# EAGLE board E-Book v8 (EAGLE 9.7.0), part 1 of 3
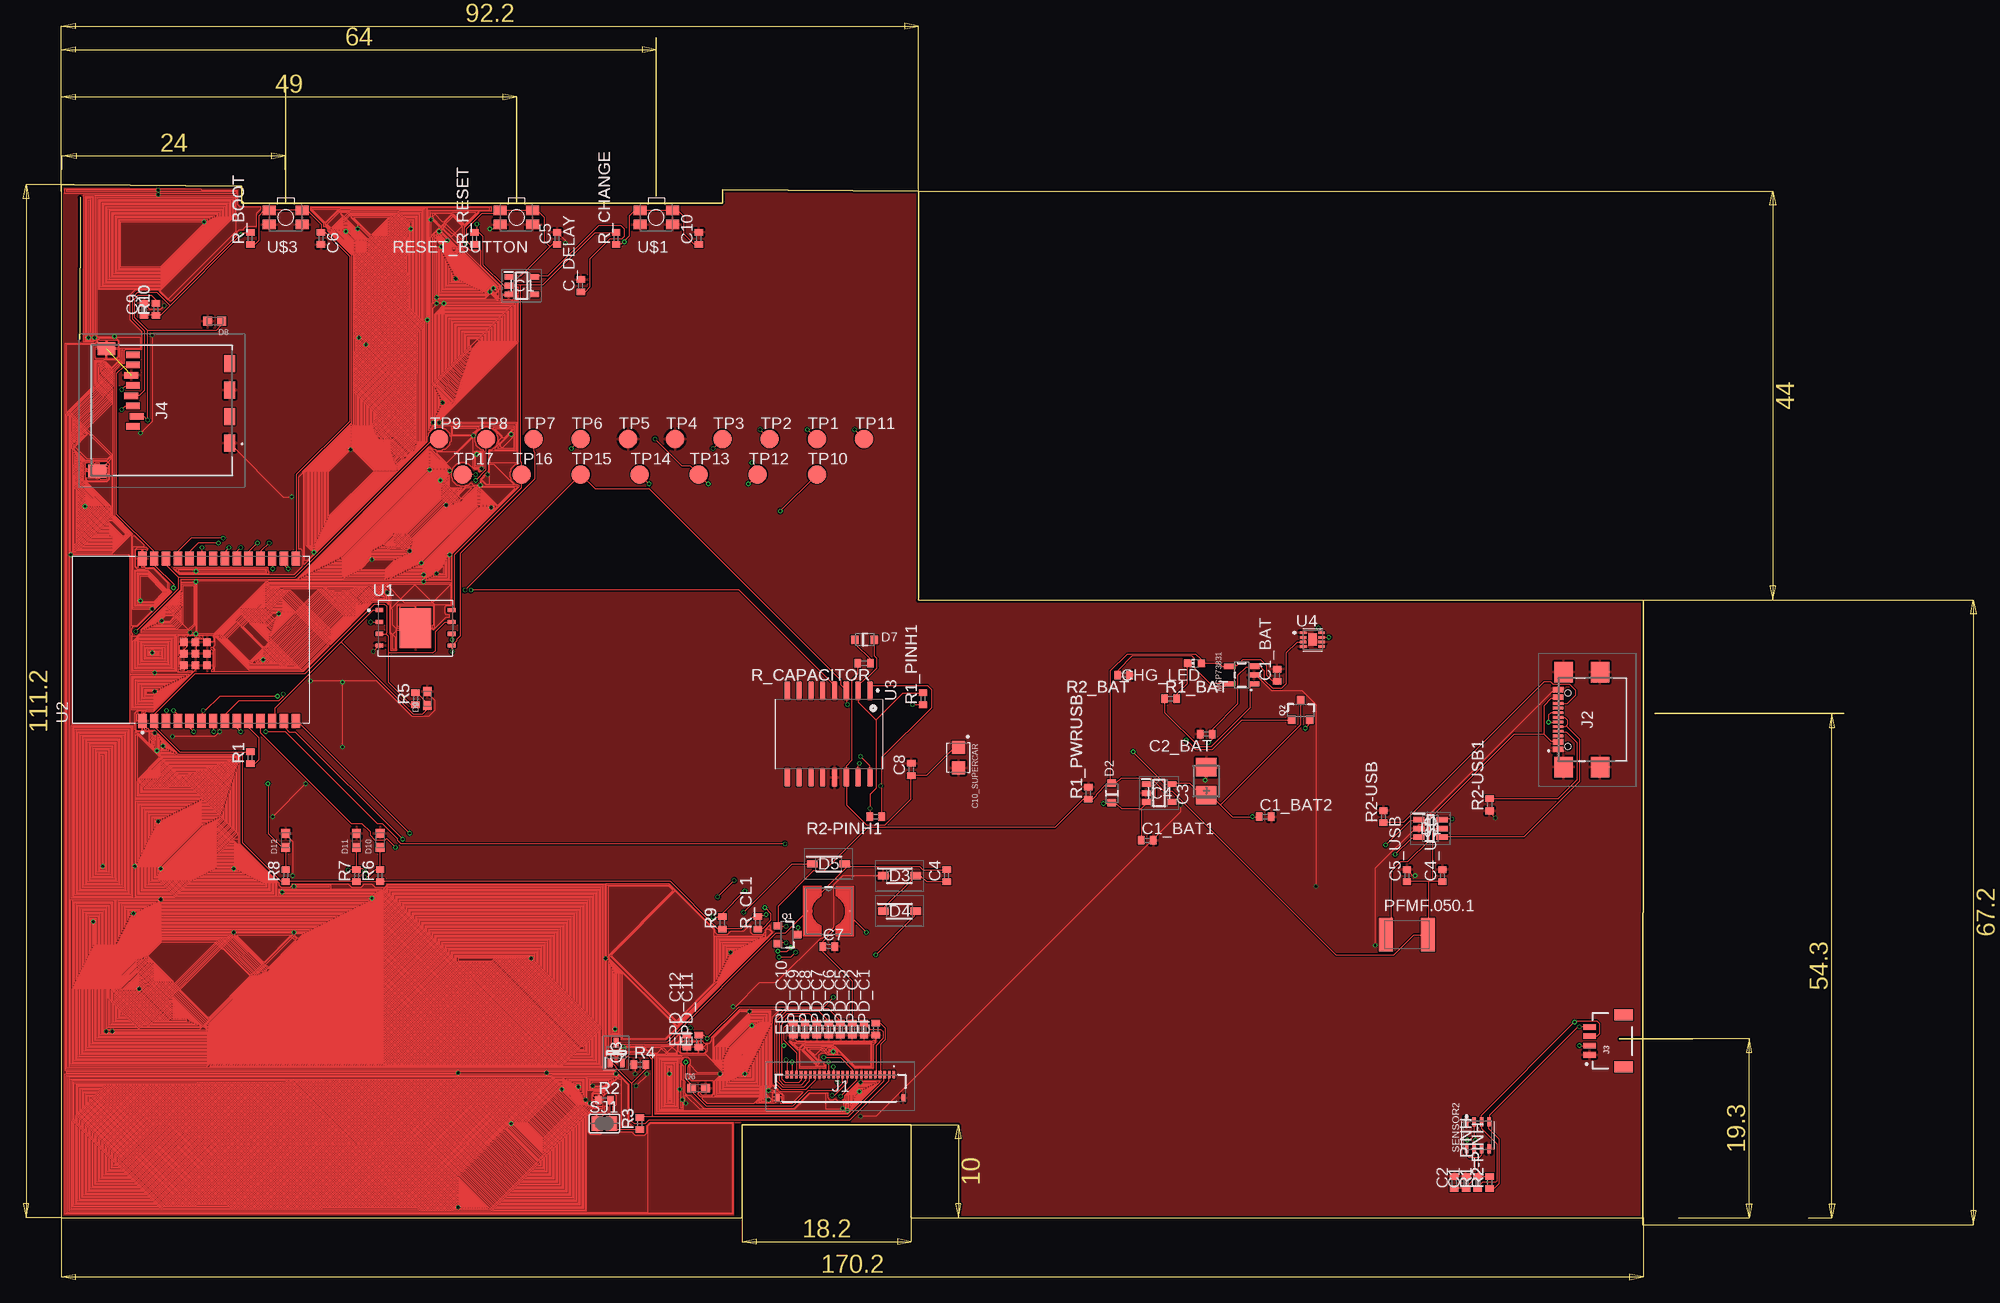
[diagram p0: board, top side]
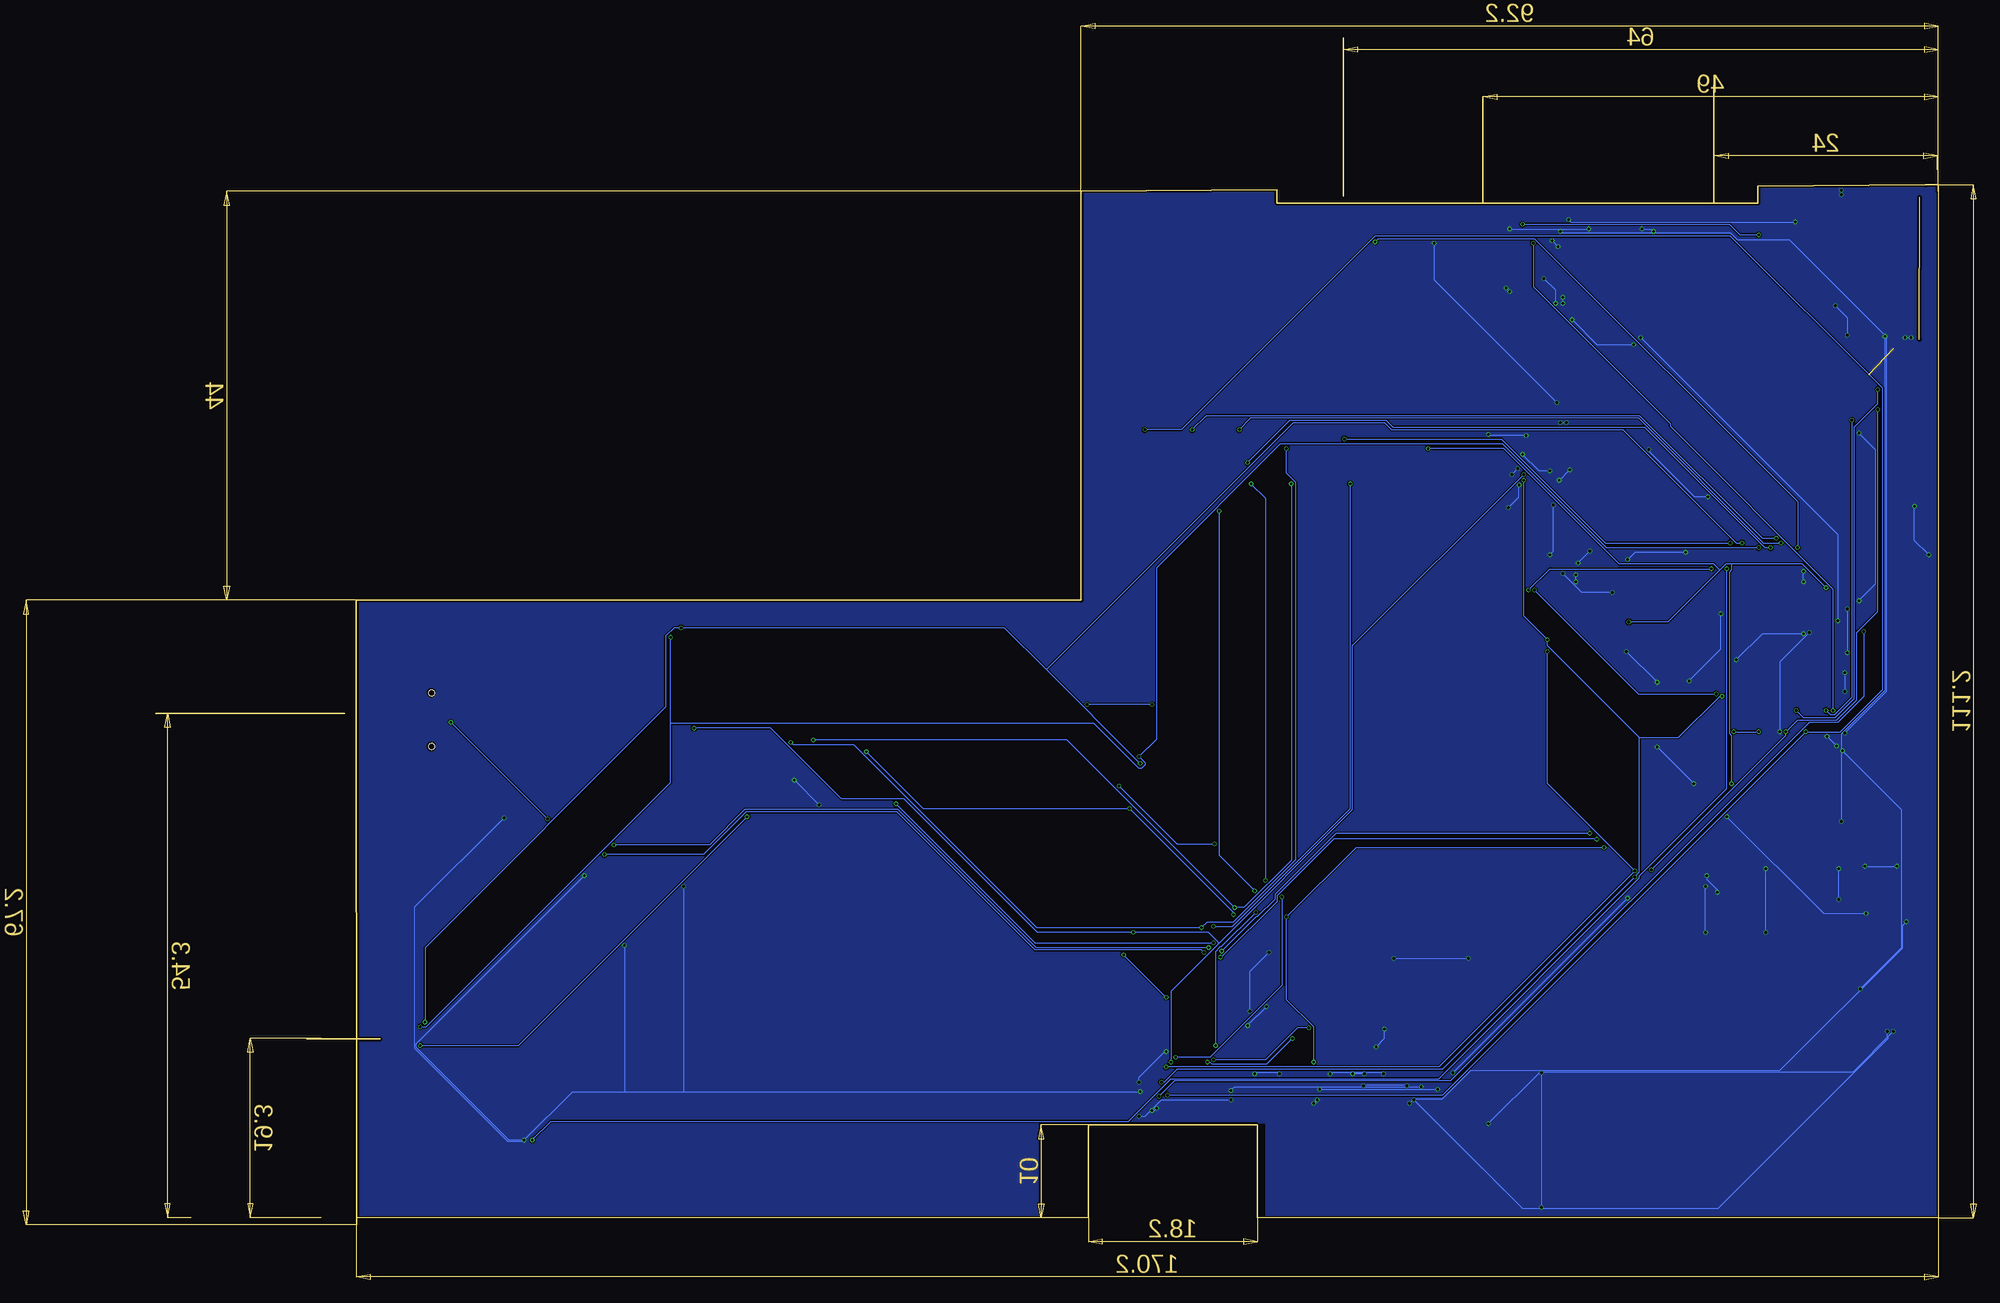
[diagram p1: board, bottom side, seen from below]

Size 191.77 x 127.7 mm. Coordinates in mm from the lower left corner, seen from the top.
Outline: 170.2,0.71 91.44,0.71 91.44,10.71 73.24,10.71 73.24,0.71 0,0.71 0,111.91 1.35,111.9 19.39,111.76 19.39,109.93 71.12,109.93 71.12,111.36 92.2,111.2 92.2,67.2 170.2,67.16 170.18,0
Outline: 191.77,55.01 171.45,55.01
Outline: 175.56,19.98 167.64,19.98
Outline: 24.13,122.63 24.13,109.93
Outline: 48.97,121.38 48.97,109.93
Outline: 64,127.7 64,110.65
Copper layers (1*16): Top 0.035mm / dielectric 1.6mm / Bottom 0.035mm
Design rules "jlcpcb-2layers": minimum track width 5mil, minimum drill 0.3mm, track to track 5mil, track to pad 5mil, pad to pad 5mil, via to via 5mil, smd to smd 5mil, copper to edge 0.2mm, drill to drill 6mil, minimum pad ring 10mil, minimum via ring 3mil, stop-mask expansion 4mil, vias tented up to drill 0mil, thermal gap 10mil

## Footprints (pad centres in the part's own frame; a part is rotated, then mirrored left to right if it is on the bottom)
ESP32_WROVER_EAGLE-LTSPICE_C0402 = smd 0.7 x 0.9: 1 -0.65,0; 2 0.65,0
EAGLE-LTSPICE_C0402 = smd 0.7 x 0.9: 1 -0.65,0; 2 0.65,0
RCL_CT3528 = smd 2 x 2.2: + -1.5,0; - 1.5,0
CAPCP3225X100N = smd 1.4 x 1.4: 1 -1.1,0; 2 1.1,0
ADAFRUIT_CHIP-LED0603 = smd 0.8 x 0.8: A 0,-0.75; C 0,0.75
SOT95P280X145-6N = smd 1.2 x 0.6: 1 -1.25,0.95; 2 -1.25,0; 3 -1.25,-0.95; 4 1.25,-0.95; 5 1.25,0; 6 1.25,0.95
ESP32_WROVER_AVX---SD0805S020S1R0_AVX_SD0805S020S1R0_0 = smd 0.8 x 0.9: 1 -1.05,0; 2 1.05,0
SOD3716X135N = smd 1.15 x 0.8: 1 -1.75,0; 2 1.75,0
DIOC1608X36N = smd 0.97 x 0.94: 1 -0.75,0; 2 0.75,0
SOT95P280X125-5N = smd 0.9 x 0.6: 1 -1.4,0.95; 2 -1.4,0; 3 -1.4,-0.95; 4 1.4,-0.95; 5 1.4,0.95
SOT95P280X120-5N = smd 0.9 x 0.6: 1 -1.4,0.95; 2 -1.4,0; 3 -1.4,-0.95; 4 1.4,-0.95; 5 1.4,0.95
FH34SRJ24S05SH99 = smd 0.3 x 0.8: 1 5.75,1.45; 2 5.25,1.45; 3 4.75,1.45; 4 4.25,1.45; 5 3.75,1.45; 6 3.25,1.45; 7 2.75,1.45; 8 2.25,1.45; 9 1.75,1.45; 10 1.25,1.45; 11 0.75,1.45; 12 0.25,1.45; 13 -0.25,1.45; 14 -0.75,1.45; 15 -1.25,1.45; 16 -1.75,1.45; 17 -2.25,1.45; 18 -2.75,1.45; 19 -3.25,1.45; 20 -3.75,1.45; 21 -4.25,1.45; 22 -4.75,1.45; 23 -5.25,1.45; 24 -5.75,1.45 | smd 0.4 x 0.8: MP1 6.75,-1.05; MP2 -6.75,-1.05
SAMACSYS_PARTS_USB4110GFA = smd 0.3 x 1.15: A1 -3.35,3.678; A4 -2.55,3.678; A5 -1.25,3.678; A6 -0.25,3.678; A7 0.25,3.678; A8 1.25,3.678; A9 2.55,3.678; A12 3.35,3.678; B1 3.05,3.678; B4 2.25,3.678; B5 1.75,3.678; B6 0.75,3.678; B7 -0.75,3.678; B8 -1.75,3.678; B9 -2.25,3.678; B12 -3.05,3.678 | smd 2.18 x 2: MP1 -5.11,-0.827; MP2 5.11,-0.827; MP3 -5.11,3.103; MP4 5.11,3.103 | hole 0.65: -2.89,2.603; 2.89,2.603
JST04_1MM_RA = smd 0.6 x 1.35: 1 -1.5,0; 2 -0.5,0; 3 0.5,0; 4 1.5,0 | smd 1.2 x 2: NC1 2.8,-3.675; NC2 -2.8,-3.675
112ATAARR03ATTEND = smd 1.8 x 1.2: G1 10.6,10.4; G2 4.9,10.4; S1 7.75,10.4; S2 2.05,10.4 | smd 1.4 x 1.9: G3 13.6,-3.85; G4 0.45,-2.85 | smd 0.7 x 1.5: P1 8.8,0; P2 7.7,0.4; P3 6.6,0; P4 5.5,-0.2; P5 4.4,0; P6 3.3,-0.2; P7 2.2,0; P8 1.1,0
IND_4828-WE-TPC_WRE = smd 0.127 x 0.127: 1 -2.286,0; 2 2.286,0
ESP32_WROVER_SPARKFUN-IC-POWER_SOT23-5 = smd 0.55 x 1.2: 1 -0.95,-1.3; 2 0,-1.3; 3 0.95,-1.3; 4 0.95,1.3; 5 -0.95,1.3
ESP32C6_VARISTOR_CT/CN1812 = smd 1.5 x 3.6: 1 -2.25,0; 2 2.25,0
ESP32_WROVER_SPARKFUN-DISCRETESEMI_SOT23-3 = smd 0.8 x 0.9: 1 -0.95,-1; 2 0.95,-1; 3 0,1.1
SOT65P210X110-3N = smd 1.05 x 0.5: 1 -1.05,0.65; 2 -1.05,-0.65; 3 1.05,0
ESP32_WROVER_EAGLE-LTSPICE_R0402 = smd 0.7 x 0.9: 1 -0.65,0; 2 0.65,0
MYBUTTON = smd 1.4 x 1.05: 1 1.75,0.75; 2 -1.75,0.75; 3 -1.75,-0.75; 4 1.75,-0.75
ESP32_WROVER_BME680_PSON80P300X300X100-8N = smd 1.016 x 0.5: 1 1.458,1.2; 2 1.458,0.4; 3 1.458,-0.4; 4 1.458,-1.2; 5 -1.458,-1.22; 6 -1.458,-0.4; 7 -1.458,0.4; 8 -1.458,1.2
SJ = smd 1.168 x 1.6: 1 -0.762,0; 2 0.762,0
TP20R = smd 2 x 2: TP 0,0
SON127P600X800X80-9N = smd 0.94 x 0.44: 1 -3.895,1.905; 2 -3.895,0.635; 3 -3.895,-0.635; 4 -3.895,-1.905; 5 3.895,-1.905; 6 3.895,-0.635; 7 3.895,0.635; 8 3.895,1.905 | smd 3.4 x 4.3: 9 0,0
XCVR_ESP32-C6-WROOM-1-N8 = smd 1.5 x 0.9: 1 -8.75,5.26; 2 -8.75,3.99; 3 -8.75,2.72; 4 -8.75,1.45; 5 -8.75,0.18; 6 -8.75,-1.09; 7 -8.75,-2.36; 8 -8.75,-3.63; 9 -8.75,-4.9; 10 -8.75,-6.17; 11 -8.75,-7.44; 12 -8.75,-8.71; 13 -8.75,-9.98; 14 -8.75,-11.25; 15 8.75,-11.25; 16 8.75,-9.98; 17 8.75,-8.71; 18 8.75,-7.44; 19 8.75,-6.17; 20 8.75,-4.9; 21 8.75,-3.63; 22 8.75,-2.36; 23 8.75,-1.09; 24 8.75,0.18; 25 8.75,1.45; 26 8.75,2.72; 27 8.75,3.99; 28 8.75,5.26 | smd 0.8 x 0.8: 29_1 -2.755,0.79; 29_2 -1.505,0.79; 29_3 -0.255,0.79; 29_4 -2.755,-0.46; 29_5 -1.505,-0.46; 29_6 -0.255,-0.46; 29_7 -2.755,-1.71; 29_8 -1.505,-1.71; 29_9 -0.255,-1.71
SOIC127P1032X265-16N = smd 2.05 x 0.59: 1 -4.655,4.445; 2 -4.655,3.175; 3 -4.655,1.905; 4 -4.655,0.635; 5 -4.655,-0.635; 6 -4.655,-1.905; 7 -4.655,-3.175; 8 -4.655,-4.445; 9 4.655,-4.445; 10 4.655,-3.175; 11 4.655,-1.905; 12 4.655,-0.635; 13 4.655,0.635; 14 4.655,1.905; 15 4.655,3.175; 16 4.655,4.445
SON50P200X200X80-9N = smd 0.76 x 0.27: 1 -0.985,0.75; 2 -0.985,0.25; 3 -0.985,-0.25; 4 -0.985,-0.75; 5 0.985,-0.75; 6 0.985,-0.25; 7 0.985,0.25; 8 0.985,0.75 | smd 0.9 x 1.3: 9 0,0

## Placement (x,y rotation side)
C1  100nF  [ESP32_WROVER_EAGLE-LTSPICE_C0402]  151.13,4.52 90 top
C1_BAT  4.7uF  [ESP32_WROVER_EAGLE-LTSPICE_C0402]  130.81,59.13 90 top
C1_BAT1  4.7uF  [EAGLE-LTSPICE_C0402]  116.84,41.35 0 top
C1_BAT2  4.7uF  [EAGLE-LTSPICE_C0402]  129.54,43.89 0 top
C2  100nF  [ESP32_WROVER_EAGLE-LTSPICE_C0402]  149.86,4.52 90 top
C2_BAT  4.7uF  [ESP32_WROVER_EAGLE-LTSPICE_C0402]  123.19,52.78 180 top
C3  100uF TANT  [RCL_CT3528]  123.19,47.7 90 top
C4  4.7uF/25V  [ESP32_WROVER_EAGLE-LTSPICE_C0402]  95.25,37.54 90 top
C4_USB  1000nF  [EAGLE-LTSPICE_C0402]  148.59,37.54 90 top
C5  1uF  [ESP32_WROVER_EAGLE-LTSPICE_C0402]  53.34,106.12 90 top
C5_USB  4.7uF  [EAGLE-LTSPICE_C0402]  144.78,37.54 90 top
C6  100nF  [ESP32_WROVER_EAGLE-LTSPICE_C0402]  27.94,106.12 270 top
C7  10uF  [ESP32_WROVER_EAGLE-LTSPICE_C0402]  82.55,29.92 0 top
C8  100nF  [ESP32_WROVER_EAGLE-LTSPICE_C0402]  91.44,48.97 90 top
C9  100nF  [ESP32_WROVER_EAGLE-LTSPICE_C0402]  8.89,98.5 90 top
C10  100nF  [ESP32_WROVER_EAGLE-LTSPICE_C0402]  68.58,106.12 90 top
C10_SUPERCAR  CPH3225A  [CAPCP3225X100N]  96.52,50.24 270 top
C_DELAY  100nF  [ESP32_WROVER_EAGLE-LTSPICE_C0402]  55.88,101.04 90 top
CHG_LED  [ADAFRUIT_CHIP-LED0603]  121.92,60.4 90 top
D1  USBLC6-2SC6Y  [SOT95P280X145-6N]  147.32,42.62 0 top
D2  ESP32_WROVER_AVX---SD0805S020S1R0_AVX_SD0805S020S1R0_0_0AVX_SD0805S020S1R0_0_0  [ESP32_WROVER_AVX---SD0805S020S1R0_AVX_SD0805S020S1R0_0]  113.03,46.43 90 top
D3  MBR0530  [SOD3716X135N]  90.17,37.54 0 top
D4  MBR0530  [SOD3716X135N]  90.17,33.73 0 top
D5  MBR0530  [SOD3716X135N]  82.55,38.81 0 top
D6  PGB1010603MR  [DIOC1608X36N]  68.58,14.68 0 top
D7  ESP32_WROVER_AVX---SD0805S020S1R0_AVX_SD0805S020S1R0_0_0AVX_SD0805S020S1R0_0_0  [ESP32_WROVER_AVX---SD0805S020S1R0_AVX_SD0805S020S1R0_0]  86.42,62.94 0 top
D8  PGB1010603MR  [DIOC1608X36N]  16.51,97.23 180 top
D9  PGB1010603MR  [DIOC1608X36N]  39.37,56.59 90 top
D10  PGB1010603MR  [DIOC1608X36N]  34.29,41.35 90 top
D11  PGB1010603MR  [DIOC1608X36N]  31.75,41.35 90 top
D12  PGB1010603MR  [DIOC1608X36N]  24.13,41.35 90 top
EPD_C1  1uF/50V  [ESP32_WROVER_EAGLE-LTSPICE_C0402]  87.63,21.03 90 top
EPD_C2  1uF/50V  [ESP32_WROVER_EAGLE-LTSPICE_C0402]  86.36,21.03 90 top
EPD_C5  0.1uF/50V  [ESP32_WROVER_EAGLE-LTSPICE_C0402]  85.09,21.03 90 top
EPD_C6  1uF/50V  [ESP32_WROVER_EAGLE-LTSPICE_C0402]  83.82,21.03 90 top
EPD_C7  1uF/50V  [ESP32_WROVER_EAGLE-LTSPICE_C0402]  82.55,21.03 90 top
EPD_C8  1uF/50V  [ESP32_WROVER_EAGLE-LTSPICE_C0402]  81.28,21.03 90 top
EPD_C9  1uF/50V  [ESP32_WROVER_EAGLE-LTSPICE_C0402]  80.01,21.03 90 top
EPD_C10  1uF/50V  [ESP32_WROVER_EAGLE-LTSPICE_C0402]  78.74,21.03 90 top
EPD_C11  1uF/50V  [ESP32_WROVER_EAGLE-LTSPICE_C0402]  68.58,19.76 90 top
EPD_C12  1uF/50V  [ESP32_WROVER_EAGLE-LTSPICE_C0402]  67.31,19.76 90 top
IC1  BD5229G-TR  [SOT95P280X125-5N]  49.53,101.04 0 top
IC4  XC6220A331MR-G  [SOT95P280X120-5N]  118.11,46.43 0 top
J1  FH34SRJ-24S-0.5SH_99_  [FH34SRJ24S05SH99]  83.82,14.68 0 top
J2  SAMACSYS_PARTS_USB4110-GF-A  [SAMACSYS_PARTS_USB4110GFA]  164.72,54.33 90 top
J3  QWIIC_RIGHT_ANGLE  [JST04_1MM_RA]  164.42,19.76 90 top
J4  112A-TAAR-R03_ATTEND  [112ATAARR03ATTEND]  7.7,94.69 270 top
L1  744043680IND_4828-WE-TPC_WRE  [IND_4828-WE-TPC_WRE]  82.55,33.73 0 top
MCP73831  ESP32_WROVER_SPARKFUN-IC-POWER_MCP73831  [ESP32_WROVER_SPARKFUN-IC-POWER_SOT23-5]  127,59.13 90 top
PFMF.050.1  ESP32C6_VARISTORCN1812  [ESP32C6_VARISTOR_CT/CN1812]  144.78,31.19 0 top
Q1  20V/4.2A/52mΩ/1.4W  [ESP32_WROVER_SPARKFUN-DISCRETESEMI_SOT23-3]  78.08,31.19 270 top
Q2  20V/4.2A/52mΩ/1.4W  [ESP32_WROVER_SPARKFUN-DISCRETESEMI_SOT23-3]  133.35,55.32 0 top
Q3  SI1308EDL-T1-GE3  [SOT65P210X110-3N]  59.69,18.49 90 top
R1  10K  [ESP32_WROVER_EAGLE-LTSPICE_R0402]  20.32,50.24 90 top
R1_BAT  200  [ESP32_WROVER_EAGLE-LTSPICE_R0402]  119.38,56.59 0 top
R1_PINH  10K  [ESP32_WROVER_EAGLE-LTSPICE_R0402]  152.4,4.52 90 top
R1_PINH1  10K  [ESP32_WROVER_EAGLE-LTSPICE_R0402]  92.71,56.59 90 top
R1_PWRUSB  100K  [ESP32_WROVER_EAGLE-LTSPICE_R0402]  110.49,46.43 90 top
R2  2.2  [ESP32_WROVER_EAGLE-LTSPICE_R0402]  58.42,13.41 0 top
R2-PINH  10K  [ESP32_WROVER_EAGLE-LTSPICE_R0402]  153.67,4.52 90 top
R2-PINH1  10k  [ESP32_WROVER_EAGLE-LTSPICE_R0402]  87.63,43.89 180 top
R2-USB  5K1  [ESP32_WROVER_EAGLE-LTSPICE_R0402]  142.24,43.89 90 top
R2-USB1  5k1  [ESP32_WROVER_EAGLE-LTSPICE_R0402]  153.67,45.16 90 top
R2_BAT  2K  [ESP32_WROVER_EAGLE-LTSPICE_R0402]  114.3,59.13 180 top
R3  0.47  [ESP32_WROVER_EAGLE-LTSPICE_R0402]  62.23,10.87 90 top
R4  10K  [ESP32_WROVER_EAGLE-LTSPICE_R0402]  62.23,17.22 0 top
R5  10K  [ESP32_WROVER_EAGLE-LTSPICE_R0402]  38.1,56.59 90 top
R6  10K  [ESP32_WROVER_EAGLE-LTSPICE_R0402]  34.29,37.54 90 top
R7  10K  [ESP32_WROVER_EAGLE-LTSPICE_R0402]  31.75,37.54 90 top
R8  10K  [ESP32_WROVER_EAGLE-LTSPICE_R0402]  24.13,37.54 90 top
R9  10K  [ESP32_WROVER_EAGLE-LTSPICE_R0402]  71.12,32.46 90 top
R10  10K  [ESP32_WROVER_EAGLE-LTSPICE_R0402]  10.16,98.5 90 top
R_BOOT  10K  [ESP32_WROVER_EAGLE-LTSPICE_R0402]  20.32,106.12 90 top
R_CAPACITOR  15  [ESP32_WROVER_EAGLE-LTSPICE_R0402]  86.36,60.4 180 top
R_CHANGE  10K  [ESP32_WROVER_EAGLE-LTSPICE_R0402]  59.69,106.12 90 top
R_CL1  10K  [ESP32_WROVER_EAGLE-LTSPICE_R0402]  74.93,32.46 90 top
R_RESET  10K  [ESP32_WROVER_EAGLE-LTSPICE_R0402]  44.45,106.12 90 top
RESET_BUTTON  BUTTON_CUSYOMV1  [MYBUTTON]  48.97,108.38 180 top
SENSOR2  ESP32_WROVER_BME680_BME680  [ESP32_WROVER_BME680_PSON80P300X300X100-8N]  152.4,9.6 90 top
SJ1  [SJ]  58.42,10.87 0 top
TP1  TPTP20R  [TP20R]  81.28,84.53 0 top
TP2  TPTP20R  [TP20R]  76.2,84.53 0 top
TP3  TPTP20R  [TP20R]  71.12,84.53 0 top
TP4  TPTP20R  [TP20R]  66.04,84.53 0 top
TP5  TPTP20R  [TP20R]  60.96,84.53 0 top
TP6  TPTP20R  [TP20R]  55.88,84.53 0 top
TP7  TPTP20R  [TP20R]  50.8,84.53 0 top
TP8  TPTP20R  [TP20R]  45.72,84.53 0 top
TP9  TPTP20R  [TP20R]  40.64,84.53 0 top
TP10  TPTP20R  [TP20R]  81.28,80.72 0 top
TP11  TPTP20R  [TP20R]  86.36,84.53 0 top
TP12  TPTP20R  [TP20R]  74.93,80.72 0 top
TP13  TPTP20R  [TP20R]  68.58,80.72 0 top
TP14  TPTP20R  [TP20R]  62.23,80.72 0 top
TP15  TPTP20R  [TP20R]  55.88,80.72 0 top
TP16  TPTP20R  [TP20R]  49.53,80.72 0 top
TP17  TPTP20R  [TP20R]  43.18,80.72 0 top
U1  W25Q512JVEIQ  [SON127P600X800X80-9N]  38.1,64.21 0 top
U2  ESP32-C6-WROOM-1-N8  [XCVR_ESP32-C6-WROOM-1-N8]  13.97,62.94 90 top
U3  DS3231SN#  [SOIC127P1032X265-16N]  82.55,52.78 270 top
U4  MAX17048G+T10  [SON50P200X200X80-9N]  134.62,62.94 0 top
U$1  BUTTON_CUSYOMV1  [MYBUTTON]  64,108.38 180 top
U$3  BUTTON_CUSYOMV1  [MYBUTTON]  24.13,108.38 180 top

## Library data of the parts
C1 C1_BAT C1_BAT1 C1_BAT2 C2 C2_BAT C4 C4_USB C5 C5_USB C6-C10 C_DELAY EPD_C1 EPD_C2 EPD_C5-EPD_C12 = DeskAssistant v19 v1; SPICEMODEL: NONE; SPICEPREFIX: C
C3 = DeskAssistant v19 v1; SPICEPREFIX: C
C10_SUPERCAR = DeskAssistant v19 v1; AVAILABILITY: Not in stock; CHECK_PRICES: https://www.snapeda.com/parts/CPH3225A/Seiko+Instruments/view-part/?ref=eda; DESCRIPTION: 11 mF (EDLC) Supercapacitor 3.3 V 1210 (3225 Metric) - -; MF: Seiko Instruments; MP: CPH3225A; PACKAGE: 1210 Seiko; PRICE: None; PURCHASE-URL: https://www.snapeda.com/api/url_track_click_mouser/?unipart_id=562593&manufacturer=Seiko Instruments&part_name=CPH3225A&search_term=None; SNAPEDA_LINK: https://www.snapeda.com/parts/CPH3225A/Seiko+Instruments/view-part/?ref=snap
CHG_LED PFMF.050.1 RESET_BUTTON SJ1 TP1-TP17 U$1 U$3 = DeskAssistant v19 v1
D1 = DeskAssistant v19 v1; AVAILABILITY: In Stock; CHECK_PRICES: https://www.snapeda.com/parts/USBLC6-2SC6Y/STMicroelectronics/view-part/?ref=eda; DESCRIPTION: 17V Clamp 5A (8/20µs) Ipp Tvs Diode Surface Mount SOT-23-6; MF: STMicroelectronics; MP: USBLC6-2SC6Y; PACKAGE: SOT-23-6 STMicroelectronics; PRICE: None; SNAPEDA_LINK: https://www.snapeda.com/parts/USBLC6-2SC6Y/STMicroelectronics/view-part/?ref=snap
D2 D7 = DeskAssistant v19 v1; CENTROID_NOT_SPECIFIED: No; DATASHEET: http://datasheets.avx.com/schottky.pdf; DIGIKEY_DESCRIPTION: DIODE SCHOTTKY 20V 1A 0805; DIGIKEY_PART_NUMBER: 478-7800-1-ND; LEAD_FREE: yes; MF: AVX; MOUSER_PART_NUMBER: 581-SD0805S020S1R0; PACKAGE: 0805 (2012 metric); PREFIX: D; ROHS: yes; TEMPERATURE_RANGE_HIGH: +125°C; TEMPERATURE_RANGE_LOW: -55°C
D3-D5 = DeskAssistant v19 v1; AVAILABILITY: In Stock; CHECK_PRICES: https://www.snapeda.com/parts/MBR0530/Onsemi/view-part/?ref=eda; DESCRIPTION: Diode Schottky 30 V 500mA Surface Mount SOD-123; MF: ON Semiconductor; MP: MBR0530; PACKAGE: SOD-123-2 ON Semiconductor; PRICE: None; PURCHASE-URL: https://www.snapeda.com/api/url_track_click_mouser/?unipart_id=179458&manufacturer=ON Semiconductor&part_name=MBR0530&search_term=None; SNAPEDA_LINK: https://www.snapeda.com/parts/MBR0530/Onsemi/view-part/?ref=snap
D6 D8-D12 = DeskAssistant v19 v1; AVAILABILITY: In Stock; CHECK_PRICES: https://www.snapeda.com/parts/PGB1010603MR/Littelfuse/view-part/?ref=eda; DESCRIPTION: 150V (Typ) Clamp - Ipp Tvs Diode Surface Mount 0603 (1608 Metric); MF: Littelfuse Inc.; MP: PGB1010603MR; PACKAGE: 0603 Littelfuse Inc.; PRICE: None; PURCHASE-URL: https://www.snapeda.com/api/url_track_click_mouser/?unipart_id=5659453&manufacturer=Littelfuse Inc.&part_name=PGB1010603MR&search_term=None; SNAPEDA_LINK: https://www.snapeda.com/parts/PGB1010603MR/Littelfuse/view-part/?ref=snap
IC1 = DeskAssistant v19 v1; DESCRIPTION: Voltage Detector with Adjustable Delay Time: CMOS processes are utilized to develop high precision, low current consumption CMOS reset ICs that allow arbitrary setting of the delay time. The extensive lineup includes both Nch Open Drain and CMOS output types in a wide range of detection voltages (from 2.3V to 6.0V, in 0.1V steps), enabling selection of the ideal solution based on customer requirements. In addition, the entire series is of course both lead-free and RoHS-compliant.; HEIGHT: 1.25mm; MANUFACTURER_NAME: ROHM Semiconductor; MANUFACTURER_PART_NUMBER: BD5229G-TR; MOUSER_PART_NUMBER: 755-BD5229G-TR; MOUSER_PRICE-STOCK: https://www.mouser.co.uk/ProductDetail/ROHM-Semiconductor/BD5229G-TR?qs=4kLU8WoGk0vvnhrrYwdszw%3D%3D
IC4 = DeskAssistant v19 v1; DESCRIPTION: LDO Voltage Regulators; HEIGHT: 1.2mm; MANUFACTURER_NAME: Torex; MANUFACTURER_PART_NUMBER: XC6220A331MR-G; MOUSER_PART_NUMBER: 865-XC6220A331MR-G; MOUSER_PRICE-STOCK: https://www.mouser.co.uk/ProductDetail/Torex-Semiconductor/XC6220A331MR-G?qs=AsjdqWjXhJ8ZSWznL1J0gg%3D%3D
J1 = DeskAssistant v19 v1; DESCRIPTION: 24 Position FFC, FPC Connector Contacts, Top and Bottom 0.020" (0.50mm) Surface Mount, Right Angle; HEIGHT: 1.1mm; MANUFACTURER_NAME: Hirose; MANUFACTURER_PART_NUMBER: FH34SRJ-24S-0.5SH(99); MOUSER_PART_NUMBER: 798-FH34SRJ24S05SH99; MOUSER_PRICE-STOCK: https://www.mouser.co.uk/ProductDetail/Hirose-Connector/FH34SRJ-24S-0.5SH99?qs=vcbW%252B4%252BSTIpKBl5ap9J8Fw%3D%3D
J2 = DeskAssistant v19 v1; DESCRIPTION: CONN USB 2.0 TYPE-C R/A SMT; HEIGHT: 3.26mm; MANUFACTURER_NAME: GCT (GLOBAL CONNECTOR TECHNOLOGY); MANUFACTURER_PART_NUMBER: USB4110-GF-A; MOUSER_PART_NUMBER: 640-USB4110-GF-A; MOUSER_PRICE-STOCK: https://www.mouser.co.uk/ProductDetail/GCT/USB4110-GF-A?qs=KUoIvG%2F9IlYiZvIXQjyJeA%3D%3D
J3 = DeskAssistant v19 v1; PROD_ID: CONN-13694
J4 = DeskAssistant v19 v1; DESCRIPTION: Micro SD Card Socket, Push-Push Type, Top Mount, SMT, H=1.83mm, 10u; HEIGHT: 1.9mm; MANUFACTURER_NAME: ATTEND; MANUFACTURER_PART_NUMBER: 112A-TAAR-R03 ATTEND
L1 = DeskAssistant v19 v1; COPYRIGHT: Copyright (C) 2024 Ultra Librarian. All rights reserved.; MANUFACTURER_PART_NUMBER: 744043680; MFR_NAME: Wurth Electronics
MCP73831 = DeskAssistant v19 v1; PROD_ID: IC-09995
Q1 Q2 = DeskAssistant v19 v1; PROD_ID: TRAN-14388
Q3 = DeskAssistant v19 v1; AVAILABILITY: In Stock; CHECK_PRICES: https://www.snapeda.com/parts/SI1308EDL-T1-GE3/Vishay+Siliconix/view-part/?ref=eda; DESCRIPTION: Si1308EDL-T1-GE3 N-channel MOSFET Transistor, 1.5 A, 30 V, 3-Pin SC-70 | Siliconix / Vishay SI1308EDL-T1-GE3; MF: Vishay Siliconix; MP: SI1308EDL-T1-GE3; PACKAGE: SOT-323 Vishay Semiconductor; PRICE: None; PURCHASE-URL: https://www.snapeda.com/api/url_track_click_mouser/?unipart_id=274603&manufacturer=Vishay Siliconix&part_name=SI1308EDL-T1-GE3&search_term=None; SNAPEDA_LINK: https://www.snapeda.com/parts/SI1308EDL-T1-GE3/Vishay+Siliconix/view-part/?ref=snap
R1 R1_BAT R1_PINH R1_PINH1 R1_PWRUSB R2 R2-PINH R2-PINH1 R2-USB R2-USB1 R2_BAT R3-R10 R_BOOT R_CAPACITOR R_CHANGE R_CL1 R_RESET = DeskAssistant v19 v1; SPICEMODEL: NONE; SPICEPREFIX: R
SENSOR2 = DeskAssistant v19 v1; AVAILABILITY: Unavailable; DESCRIPTION: Integrated Environmental Unit; MF: Bosch Sensortec; MP: BME680; PACKAGE: LGA-8 Bosch Tools; PRICE: None
U1 = DeskAssistant v19 v1; AVAILABILITY: In Stock; CHECK_PRICES: https://www.snapeda.com/parts/W25Q512JVEIQ/Winbond+Electronics/view-part/?ref=eda; DESCRIPTION: FLASH - NOR Memory IC 512Mb (64M x 8) SPI - Quad I/O 133 MHz 8-WSON (8x6); MF: Winbond Electronics; MP: W25Q512JVEIQ; PACKAGE: Package; PRICE: None; SNAPEDA_LINK: https://www.snapeda.com/parts/W25Q512JVEIQ/Winbond+Electronics/view-part/?ref=snap
U2 = DeskAssistant v19 v1; AVAILABILITY: In Stock; CHECK_PRICES: https://www.snapeda.com/parts/ESP32-C6-WROOM-1-N8/Espressif+Systems/view-part/?ref=eda; DESCRIPTION: Multiprotocol Modules ESP32-C6 module, Wi-Fi 6 in 2.4 GHz band, Bluetooth 5, Zigbee 3.0 and Thread. ESP34-WROOM Compatible - ENGINEERING SAMPLE; MF: Espressif Systems; MP: ESP32-C6-WROOM-1-N8; PACKAGE: None; PRICE: None; SNAPEDA_LINK: https://www.snapeda.com/parts/ESP32-C6-WROOM-1-N8/Espressif+Systems/view-part/?ref=snap
U3 = DeskAssistant v19 v1; AVAILABILITY: In Stock; CHECK_PRICES: https://www.snapeda.com/parts/DS3231SN%23/Analog+Devices/view-part/?ref=eda; DESCRIPTION: Extremely Accurate I²C-Integrated RTC/TCXO/Crystal; MF: Analog Devices; MP: DS3231SN#; PACKAGE: SOIC-16 Maxim; PRICE: None; PURCHASE-URL: https://www.snapeda.com/api/url_track_click_mouser/?unipart_id=99048&manufacturer=Analog Devices&part_name=DS3231SN#&search_term=None; SNAPEDA_LINK: https://www.snapeda.com/parts/DS3231SN%23/Analog+Devices/view-part/?ref=snap
U4 = DeskAssistant v19 v1; AVAILABILITY: In Stock; CHECK_PRICES: https://www.snapeda.com/parts/MAX17048G+T10/Analog+Devices/view-part/?ref=eda; DESCRIPTION: 3µA 1-Cell/2-Cell Fuel Gauge with ModelGauge; MF: Analog Devices; MP: MAX17048G+T10; PACKAGE: TDFN-8 Maxim; PRICE: None; PURCHASE-URL: https://www.snapeda.com/api/url_track_click_mouser/?unipart_id=329239&manufacturer=Analog Devices&part_name=MAX17048G+T10&search_term=None; SNAPEDA_LINK: https://www.snapeda.com/parts/MAX17048G+T10/Analog+Devices/view-part/?ref=snap

## Nets
3V3: C1_BAT2.1 C3.+ C9.1 D7.2 IC1.2 IC4.5 J3.2 J4.P4 Q2.3 R1.2 R1_PINH1.2 R2-PINH1.2 R5.1 R6.1 R7.1 R8.1 R9.1 R10.1 R_BOOT.2 R_CHANGE.2 R_CL1.2 R_RESET.2 TP16.TP U1.3 U1.7 U1.8 U2.2 U3.2
32KHZ: R2-PINH1.1 U2.9 U3.1
DN: D1.4 J2.A7 J2.B7
DP: D1.6 J2.A6 J2.B6
EPD_3V3: C7.1 EPD_C5.2 J1.15 J1.16 L1.2 Q2.2 TP17.TP
EPD_3V3_C: Q2.1 R_CL1.1 TP13.TP U2.18
EPD_BUSY: J1.9 TP9.TP U2.26
EPD_CS: D6.1 J1.12 R9.2 TP10.TP U2.11
EPD_DC: J1.11 TP11.TP U2.5
EPD_RST: J1.10 TP12.TP U2.21
FLASH_CS: D9.1 R5.2 U1.1 U2.12
GDR: J1.2 Q3.1 R4.2
GND: C1.2 C1_BAT1.2 C1_BAT2.2 C1_BAT.2 C2.2 C2_BAT.2 C3.- C4_USB.2 C5.2 C5_USB.2 C6.2 C7.2 C8.2 C9.2 C10.2 C10_SUPERCAR.2 C_DELAY.2 D1.2 D3.1 D6.2 D8.2 D9.2 D10.2 D11.2 D12.2 EPD_C1.1 EPD_C2.1 EPD_C5.1 EPD_C6.1 EPD_C7.1 EPD_C8.1 EPD_C9.1 EPD_C10.1 EPD_C11.1 EPD_C12.1 IC1.3 IC4.2 J1.8 J1.17 J1.MP1 J1.MP2 J2.A1 J2.A12 J2.B1 J2.B12 J2.MP1 J2.MP2 J2.MP3 J2.MP4 J3.1 J4.G1 J4.G2 J4.G3 J4.G4 J4.P6 MCP73831.2 R1_PWRUSB.2 R2-USB1.1 R2-USB.2 R2.1 R2_BAT.1 R4.1 RESET_BUTTON.1 RESET_BUTTON.2 SENSOR2.1 SENSOR2.5 SENSOR2.7 SJ1.1 TP4.TP TP5.TP U1.4 U1.9 U2.1 U2.28 U2.29_1 U2.29_2 U2.29_3 U2.29_4 U2.29_5 U2.29_6 U2.29_7 U2.29_8 U2.29_9 U3.13 U4.1 U4.4 U4.6 U4.9 U$1.1 U$1.2 U$3.1 U$3.2
GPIO8: R1.1 U2.10
I2C_PW: C1.1 C2.1 R1_PINH.2 R2-PINH.2 SENSOR2.2 SENSOR2.6 SENSOR2.8 U2.17
INT_RTC: R1_PINH1.1 TP15.TP U2.8 U3.3
IO/BOOT: C6.1 R_BOOT.1 U2.15 U$3.3 U$3.4
IO/CHANGE: C10.1 R_CHANGE.1 U2.23 U$1.3 U$1.4
MISO: D12.1 J4.P7 R8.2 TP6.TP U1.2 U2.27
MOSI: D11.1 J1.14 J4.P3 R7.2 TP7.TP U1.5 U2.7
N$1: J2.B5 R2-USB.1
N$2: J2.A5 R2-USB1.2
N$4: CHG_LED.C R1_BAT.2
N$5: EPD_C1.2 J1.4
N$6: MCP73831.5 R2_BAT.2
N$7: EPD_C2.2 J1.5
N$9: MCP73831.1 R1_BAT.1
N$11: EPD_C6.2 J1.18
N$12: EPD_C7.2 J1.19
N$13: EPD_C8.2 J1.20
N$15: EPD_C10.2 J1.22
N$17: EPD_C12.2 J1.24
N$24: C_DELAY.1 IC1.5
N$26: C1_BAT1.1 D2.1 IC4.1 IC4.3 Q1.2
N$30: C4.1 D3.2 D4.1
N$31: D7.1 R_CAPACITOR.1
PREVGH: D5.1 EPD_C9.2 J1.21
PREVGL: D4.2 EPD_C11.2 J1.23
RESE: J1.3 Q3.2 R3.2
RESE': R2.2 R3.1 SJ1.2
RESET: C5.1 IC1.1 R_RESET.1 RESET_BUTTON.3 RESET_BUTTON.4 U2.3
RTC_RST: U2.16 U3.4
RX: TP2.TP U2.24
SCK: D10.1 J1.13 J4.P5 R6.2 TP8.TP U1.6 U2.6
SCL: J3.4 R2-PINH.1 SENSOR2.4 U2.20 U3.16 U4.7
SDA: J3.3 R1_PINH.1 SENSOR2.3 U2.19 U3.15 U4.8
SRC: C4.2 D5.2 L1.1 Q3.3
SS_SD: D8.1 J4.P2 R10.2 U2.4
TX: TP1.TP U2.25
USB_D+: D1.1 U2.14
USB_D-: D1.3 U2.13
VBAT: C2_BAT.1 MCP73831.3 Q1.3 TP3.TP U4.2 U4.3
VBUS: C1_BAT.1 C4_USB.1 C5_USB.1 CHG_LED.A D1.5 D2.2 MCP73831.4 PFMF.050.1.2 Q1.1 R1_PWRUSB.1 TP14.TP
VRTC: C8.1 C10_SUPERCAR.1 R_CAPACITOR.2 U3.14
VUSB: J2.A4 J2.A9 J2.B4 J2.B9 PFMF.050.1.1

## Tracks (layer width: path | path; a pad name or v marks a point on that pad's centre or on a via)
3V3  (via drill 0.3)
  Top 0.127: 31.75,36.91 24.13,36.91 | 31.75,36.91 34.29,36.91 | 31.75,36.91 R7.1 | 19.43,50.88 12.7,50.88 10.03,53.54 10.03,54.18 U2.2 10.03,54.3 10.03,54.94 14.35,59.26 26.16,59.26 33.66,66.75 34.8,66.75 35.05,66.5 35.05,63.7 34.92,63.58 | 19.43,50.88 20.32,50.88 R1.2 | 24.13,36.91 23.62,36.91 19.43,41.1 19.43,50.88 | 24.13,36.91 R8.1 | 10.16,97.86 8.89,97.86 C9.1 | 11.68,98.88 10.67,97.86 10.16,97.86 | 11.68,98.88 v19.3,106.5 19.56,106.75 20.32,106.75 R_BOOT.2 | 10.16,97.86 R10.1 | 11.68,98.88 10.29,100.28 8.13,100.28 7.62,99.77 7.62,97.48 8.89,96.21 8.89,89.74 8.38,89.23 7.62,89.23 J4.P4 | 44.7,106.75 44.45,106.75 R_RESET.2 44.7,106.75 | 44.7,106.75 44.96,106.75 45.34,106.37 45.34,103.33 47.62,101.04 IC1.2 48.26,101.17 49.4,101.17 | 49.4,101.17 51.82,101.17 57.4,106.75 59.69,106.75 R_CHANGE.2 | 42.04,66.11 42.04,64.84 U1.7 41.27,64.84 40.26,63.83 40.26,61.8 40.01,61.54 35.18,61.54 | 35.18,61.54 35.18,63.32 34.92,63.58 | 35.18,61.54 35.18,58.37 37.59,55.95 38.1,55.95 R5.1 | U1.3 34.92,63.58 | 42.04,66.11 42.29,66.37 42.29,72.08 49.53,79.32 TP16.TP 49.53,81.99 49.4,82.12 49.4,101.17 | 42.04,66.11 U1.8 | 44.7,106.75 v44.7,107.64 | 71.12,31.82 73.15,31.82 74.42,33.09 74.93,33.09 R_CL1.2 74.93,33.22 75.69,33.22 v75.82,33.35 | 87.63,54.3 87.63,46.94 87,46.3 v87,44.78 87,43.89 R2-PINH1.2 | 87.63,54.3 85.72,56.21 U3.2 85.72,57.99 86.61,58.88 86.74,58.88 87.76,59.89 87.76,60.91 87.5,61.16 87.5,62.94 D7.2 | 87.63,54.3 90.55,57.23 92.71,57.23 R1_PINH1.2 | C1_BAT2.1 v128.14,43.89 125.98,43.89 124.71,45.16 | 124.71,45.16 123.7,46.18 123.19,46.18 C3.+ 123.19,46.3 122.56,46.3 121.41,47.45 119.63,47.45 IC4.5 119.51,47.32 118.87,47.32 v115.32,50.88
  Top 0.127: Q2.3 133.35,53.8 124.71,45.16 | v163.32,19.25 164.34,19.25 J3.2 | 34.29,36.91 65.53,36.91 70.61,31.82 71.12,31.82 | 34.29,36.91 R6.1 | 71.12,31.82 R9.1
  Bottom 0.127: v19.3,106.5 21.34,106.5 22.48,107.64 v44.7,107.64 | v75.82,33.35 75.82,33.6 v87,44.78 109.22,44.78 v115.32,50.88 | v163.32,19.25 152.78,19.25 v128.14,43.89
32KHZ  (via drill 0.3)
  Top 0.127: 88.27,47.19 88.27,50.24 93.6,55.57 93.6,57.61 93.22,57.99 87.25,57.99 87,57.73 U3.1 | 88.27,47.19 88.27,43.89 R2-PINH1.1 | v19.3,53.03 18.92,53.41 18.92,54.18 U2.9 | v21.97,53.03 24.13,53.03 34.04,43.13 34.54,43.13 36.2,41.48 36.2,41.35 36.58,40.97 v77.85,40.97 | 88.27,47.19 v88.14,47.19
  Bottom 0.127: v21.97,53.03 v19.3,53.03 | v77.85,40.97 81.92,40.97 v88.14,47.19
DN
  Top 0.127: 161.93,53.67 162.05,53.8 162.05,54.3 161.8,54.56 161.16,54.56 J2.A7 | 161.93,53.67 161.8,53.54 161.16,53.54 J2.B7 | 161.93,53.67 163.32,52.27 163.32,47.7 157.35,41.73 148.59,41.73 D1.4
DP  (via drill 0.3)
  Top 0.127: 160.15,54.18 160.02,54.3 160.02,54.81 160.27,55.07 161.04,55.07 J2.B6 | 160.15,54.18 160.27,54.05 161.04,54.05 J2.A6 | v149.61,43.64 148.59,43.64 D1.6 | 160.15,54.18 v160.02,54.05
  Bottom 0.127: v160.02,54.05 v149.61,43.64
EPD_3V3  (via drill 0.3)
  Top 0.127: EPD_C5.2 85.09,26.24 81.92,29.41 81.92,29.92 | 82.55,16.2 82.17,16.2 J1.16 | v133.86,53.41 134.24,53.8 134.24,54.3 Q2.2 | 84.84,33.22 v86.61,31.44 | L1.2 84.84,33.22 | 84.84,33.22 84.84,31.95 83.44,31.95 81.92,30.43 81.92,29.92 | v82.55,17.47 82.55,16.2 | 82.55,16.2 J1.15 | v44.58,80.72 TP17.TP | 81.92,29.92 C7.1
  Bottom 0.127: v133.86,53.41 125.6,53.41 117.98,45.8 111.25,45.8 96.9,31.44 v86.61,31.44 78.49,31.44 77.47,30.43 77.47,30.17 | v82.55,17.47 82.55,25.09 77.47,30.17 | v44.58,80.72 62.99,62.3 62.99,44.65 77.47,30.17
EPD_3V3_C  (via drill 0.3)
  Top 0.127: v75.69,34.11 76.33,33.48 76.33,32.71 75.44,31.82 74.93,31.82 R_CL1.1 | v69.6,79.7 TP13.TP 67.69,81.61 66.8,81.61 v63.88,84.53 | v121.03,52.15 122.05,51.13 123.83,51.13 127,54.3 132.33,54.3 Q2.1 | v22.35,73.35 21.46,72.46 21.46,71.7 U2.18
  Bottom 0.127: v69.6,79.7 69.6,39.19 74.68,34.11 v75.69,34.11 93.73,52.15 v121.03,52.15 | v22.35,73.35 35.81,73.35 46.99,84.53 v63.88,84.53
EPD_BUSY  (via drill 0.3)
  Top 0.127: v83.82,13.79 85.6,15.57 85.6,16.08 J1.9 | v8,63.83 12.57,68.4 12.57,69.67 | 12.57,69.67 11.3,70.94 11.3,71.58 U2.26 | TP9.TP 40.01,84.53 25.15,69.67 12.57,69.67
  Bottom 0.127: v83.82,13.79 82.17,15.44 52.45,15.44 13.84,54.05 10.79,54.05 8,56.84 v8,63.83
EPD_CS  (via drill 0.3)
  Top 0.127: J1.12 84.07,16.08 84.07,15.19 83.31,14.43 80.39,14.43 78.74,12.77 69.34,12.77 67.94,14.17 67.94,14.68 D6.1 67.82,14.68 67.82,15.06 67.18,15.7 v67.18,17.47 | v70.1,33.09 71.12,33.09 R9.2 71.12,33.48 v73.53,35.89 | v35.94,40.59 35.05,41.48 34.92,41.48 34.8,41.35 33.78,41.35 33.27,41.86 33.27,42.24 32.38,43.13 31.24,43.13 21.46,52.91 21.46,54.18 U2.11 | v77.34,76.78 TP10.TP
  Bottom 0.127: v67.18,17.47 67.18,21.28 70.1,24.21 v70.1,33.09 62.61,40.59 v35.94,40.59 | v77.34,76.78 77.34,39.7 v73.53,35.89
EPD_DC  (via drill 0.3)
  Top 0.127: v82.93,13.92 83.19,13.92 84.58,15.32 84.58,16.08 J1.11 | v14.22,53.03 13.84,53.41 13.84,54.18 U2.5 | v85.34,85.55 TP11.TP
  Bottom 0.127: v82.93,13.92 53.34,13.92 v14.22,53.03 10.54,53.03 5.97,57.61 5.97,89.99 22.35,106.37 60.58,106.37 81.41,85.55 v85.34,85.55
EPD_RST  (via drill 0.3)
  Top 0.127: v82.04,17.98 83.82,17.98 85.09,16.71 85.09,16.2 J1.10 | v72.39,37.03 v70.61,35.25 | v73.91,79.7 TP12.TP 74.93,81.35 v74.3,81.99 | v18.03,72.85 17.65,72.46 17.65,71.7 U2.21
  Bottom 0.127: v82.04,17.98 78.36,17.98 70.61,25.73 v70.61,35.25 | v72.39,37.03 72.39,78.18 v73.91,79.7 | v18.03,72.85 18.67,72.85 31.62,85.8 58.67,85.8 59.44,86.56 69.72,86.56 v74.3,81.99
FLASH_CS
  Top 0.127: R5.2 38.1,57.23 38.35,56.97 38.48,56.97 39.37,56.08 D9.1 39.37,55.45 38.86,54.94 37.85,54.94 30.1,62.69 | U1.1 33.53,66.11 30.1,62.69 | 30.1,62.69 22.99,55.57 22.99,54.56 22.73,54.3 U2.12
GDR
  Top 0.127: 61.34,15.19 61.34,11.12 61.59,10.87 62.87,10.87 63.25,11.25 84.84,11.25 89.03,15.44 89.03,16.08 J1.2 | 61.34,15.19 62.87,16.71 62.87,17.22 R4.2 | 61.34,15.19 59.69,16.84 59.69,16.97 59.31,17.35 59.05,17.35 Q3.1
GND  (via drill 0.3)  (1 unrouted)
  Top 0.127: U2.29_5 14.48,61.54 14.48,62.56 U2.29_6 | U2.29_4 14.48,60.15 14.48,59.77 9.91,55.19 9.14,55.19 9.02,55.32 8.13,55.32 7.87,55.07 7.87,53.29 8.13,53.03 9.27,53.03 9.4,53.16 9.4,53.29 9.27,53.41 9.02,53.16 8.13,53.16 8,53.29 8,55.07 8.13,55.19 8.26,55.19 8.26,55.07 8.13,54.94 8.13,54.18 8.51,54.18 8.76,53.92 8.76,53.29 8.64,53.29 8.64,53.92 8.76,54.05 8.76,54.18 U2.1 | v14.48,70.31 21.97,70.31 21.97,70.43 12.57,70.43 12.57,70.31 12.7,70.18 22.1,70.18 22.1,70.56 12.32,70.56 12.32,70.43 12.7,70.05 22.35,70.05 22.35,70.18 22.23,70.31 22.23,70.69 12.06,70.69 12.06,70.56 12.7,69.92 25.02,69.92 25.91,70.81 25.91,72.59 25.78,72.72 25.53,72.72 25.53,80.47 31.24,86.18 31.24,104.34 28.7,106.88 28.7,107.14 28.45,107.39 28.19,107.39 28.19,107.77 26.8,109.17 26.8,109.55 46.23,109.55 46.23,109.04 44.96,109.04 43.31,107.39 43.31,106.12 43.05,105.87 43.05,105.36 43.31,105.1 43.69,105.1 43.94,104.85 45.09,104.85 45.09,103.2 47.37,100.91 47.37,100.66 47.24,100.53 47.24,100.02 47.75,100.02 48.01,100.28 48.39,100.28 48.64,100.53 48.77,100.53 48.77,100.28 48.9,100.28 48.9,100.91 49.15,100.91 49.15,100.15 48.13,100.15 IC1.3 | v14.48,69.16 12.83,69.16 12.83,69.42 25.4,69.42 39.62,83.64 39.75,83.64 40.01,83.39 40.26,83.39 40.39,83.26 40.89,83.26 41.02,83.39 41.27,83.39 41.78,83.89 41.78,84.15 41.91,84.28 41.91,84.78 41.78,84.91 41.78,85.16 41.27,85.67 41.02,85.67 40.89,85.8 40.39,85.8 40.26,85.67 40.01,85.67 39.5,85.16 39.5,84.91 39.37,84.78 39.37,84.28 26.16,71.07 26.04,71.07 26.04,80.85 25.91,80.97 31.11,86.18 36.07,81.23 36.2,81.23 39.24,84.28 39.24,109.42 26.92,109.42 26.92,109.17 39.12,96.98 39.12,84.28 36.2,81.35 36.07,81.35 31.37,86.05 31.37,104.34 28.83,106.88 28.83,107.14 28.32,107.64 29.97,109.29 39.12,109.29 39.12,97.1 31.5,89.48 31.5,86.05 36.07,81.48 36.2,81.48 38.99,84.28 38.99,96.85 28.96,106.88 28.96,107.01 31.11,109.17 38.99,109.17 38.99,97.23 31.5,89.74 31.5,89.61 37.85,83.26 36.2,81.61 36.07,81.61 31.62,86.05 31.62,89.36 38.86,96.59 38.86,96.72 31.5,104.09 31.5,104.21 36.32,109.04 38.86,109.04 38.86,97.36 31.5,89.99 31.5,89.86 37.97,83.39 38.86,84.28 38.86,96.47 31.5,103.83 31.5,103.96 36.45,108.91 38.73,108.91 38.73,97.48 31.5,90.24 31.5,90.12 37.97,83.64 38.1,83.64 38.73,84.28 38.73,96.34 31.5,103.58 31.5,103.71 36.58,108.79 38.61,108.79 38.61,97.61 31.5,90.5 31.5,90.37 38.1,83.77 38.61,84.28 38.61,96.21 31.5,103.33 31.5,103.45 36.7,108.66 38.48,108.66 38.48,97.74 31.5,90.75 31.5,90.63 38.1,84.02 38.23,84.02 38.48,84.28 38.48,96.09 31.5,103.07 31.5,103.2 36.83,108.53 38.35,108.53 38.35,97.86 31.5,91.01 31.5,90.88 38.23,84.15 38.35,84.28 38.35,95.96 31.5,102.82 31.5,102.94 36.96,108.41 38.23,108.41 38.23,97.99 31.5,91.26 31.5,91.13 38.23,84.4 38.23,84.28 35.94,81.99 35.81,81.99 31.75,86.05 31.75,89.23 38.23,95.71 38.23,95.83 31.5,102.56 31.5,102.69 37.08,108.28 38.1,108.28 38.1,98.12 31.5,91.52 31.5,91.39 38.23,84.66 38.23,84.53 35.81,82.12 31.88,86.05 31.88,89.1 38.23,95.45 38.23,95.58 31.5,102.31 31.5,102.44 37.21,108.15 37.97,108.15 37.97,98.25 31.5,91.77 31.5,91.64 38.23,84.91 38.23,84.78 35.81,82.37 35.69,82.37 32,86.05 32,88.97 38.23,95.2 38.23,95.32 31.5,102.06 31.5,102.18 37.34,108.02 37.85,108.02 37.85,98.37 31.5,92.02 31.5,91.9 38.23,85.16 38.23,85.04 35.69,82.5 32.13,86.05 32.13,88.85 38.23,94.94 38.23,95.07 31.5,101.8 31.5,101.93 37.47,107.9 37.72,107.9 37.72,98.5 31.5,92.28 31.5,92.15 38.23,85.42 38.23,85.29 35.69,82.75 35.56,82.75 32.26,86.05 32.26,88.72 38.23,94.69 38.23,94.82 31.5,101.55 31.5,101.67 37.47,107.64 37.47,107.77 36.2,109.04 31.11,109.04 30.99,109.17 29.97,109.17 29.84,109.29 27.05,109.29 27.05,109.17 28.32,107.9 28.45,107.9 29.72,109.17 37.59,101.29 37.59,98.63 31.5,92.53 31.5,92.4 38.23,85.67 38.23,85.55 35.56,82.88 32.38,86.05 32.38,88.59 38.23,94.44 38.23,94.56 31.5,101.29 31.5,101.42 37.47,107.39 37.47,107.52 36.07,108.91 30.99,108.91 30.86,109.04 29.97,109.04 28.57,107.64 28.96,107.26 29.08,107.26 30.23,108.41 30.23,108.53 29.97,108.79 30.1,108.91 30.73,108.91 37.59,102.06 37.59,101.42 31.5,95.32 31.5,92.66 38.23,85.93 38.23,85.8 35.56,83.13 35.43,83.13 32.51,86.05 32.51,88.47 38.23,94.18 38.23,94.31 31.5,101.04 31.5,101.17 37.47,107.14 37.47,107.26 35.94,108.79 30.99,108.79 29.08,106.88 31.5,104.47 35.69,108.66 35.81,108.66 37.59,106.88 37.59,102.18 31.5,96.09 31.5,95.45 38.23,88.72 38.23,86.05 35.43,83.26 32.64,86.05 32.64,88.34 38.23,93.93 38.23,94.05 31.5,100.79 31.5,100.91 37.34,106.75 37.34,106.88 35.56,108.66 31.11,108.66 29.34,106.88 31.5,104.72 31.62,104.72 32.77,105.87 32.77,105.99 30.73,108.02 30.61,108.02 30.35,108.28 29.21,107.14 31.5,104.85 31.62,104.85 32.64,105.87 32.64,105.99 30.73,107.9 30.48,107.9 30.35,108.02 29.46,107.14 31.62,104.98 32.51,105.87 32.51,105.99 30.73,107.77 30.35,107.77 29.72,107.14 29.72,107.01 29.59,106.88 31.5,104.98 32.38,105.87 32.38,105.99 30.73,107.64 30.35,107.64 29.84,107.14 29.84,106.88 31.5,105.23 31.62,105.23 32.26,105.87 32.26,105.99 30.73,107.52 30.35,107.52 29.97,107.14 29.97,106.88 31.5,105.36 31.62,105.36 32.13,105.87 32.13,105.99 30.73,107.39 30.35,107.39 30.1,107.14 30.1,106.88 31.5,105.48 31.62,105.48 32,105.87 32,105.99 30.73,107.26 30.35,107.26 30.23,107.14 30.23,106.88 31.5,105.61 31.62,105.61 31.88,105.87 31.88,105.99 30.73,107.14 30.35,107.14 30.35,106.88 31.5,105.74 31.62,105.74 31.75,105.87 31.75,105.99 30.73,107.01 30.48,107.01 30.48,106.88 31.5,105.87 31.62,105.87 31.62,105.99 30.73,106.88 v30.61,106.88
  Top 0.127: v31.88,107.14 31.88,107.64 31.11,108.41 31.24,108.53 35.43,108.53 37.47,106.5 37.47,102.31 31.5,96.34 31.5,96.21 38.23,89.48 38.23,88.85 34.16,84.78 34.04,84.78 32.77,86.05 32.77,88.21 38.23,93.67 38.23,93.8 31.5,100.53 31.5,100.66 37.21,106.37 37.21,106.5 35.31,108.41 31.5,108.41 31.5,108.28 33.27,106.5 33.4,106.5 35.18,108.28 37.34,106.12 37.34,102.44 31.5,96.59 31.5,96.47 38.23,89.74 38.23,89.61 33.78,85.16 32.89,86.05 32.89,88.09 38.23,93.42 38.23,93.55 31.5,100.28 31.5,100.4 37.08,105.99 37.08,106.12 35.18,108.02 33.53,106.37 37.21,102.69 37.21,102.56 31.5,96.85 31.5,96.72 38.23,89.99 38.23,89.86 33.78,85.42 33.66,85.42 33.02,86.05 33.02,87.96 38.23,93.17 38.23,93.29 31.5,100.02 31.5,100.15 37.08,105.74 37.08,105.87 35.18,107.77 33.78,106.37 37.21,102.94 37.21,102.82 31.5,97.1 31.5,96.98 38.23,90.24 38.23,90.12 33.66,85.55 33.15,86.05 33.15,87.83 38.23,92.91 38.23,93.04 31.5,99.77 31.5,99.9 37.08,105.48 37.08,105.61 35.18,107.52 34.04,106.37 37.21,103.2 37.21,103.07 31.5,97.36 31.5,97.23 38.23,90.5 38.23,90.37 33.66,85.8 33.53,85.8 33.27,86.05 33.27,87.7 38.23,92.66 38.23,92.78 31.5,99.52 31.5,99.64 37.08,105.23 37.08,105.36 35.18,107.26 34.29,106.37 37.21,103.45 37.21,103.33 31.5,97.61 31.5,97.48 38.23,90.75 38.23,90.63 33.53,85.93 33.4,86.05 33.4,87.58 38.23,92.4 38.23,92.53 31.5,99.26 31.5,99.39 37.08,104.98 37.08,105.1 35.18,107.01 34.54,106.37 37.21,103.71 37.21,103.58 31.5,97.86 31.5,97.74 38.23,91.01 38.23,90.88 33.53,86.18 33.53,86.05 36.96,82.62 37.08,82.62 37.97,83.51 37.85,83.64 36.07,81.86 36.07,81.74 36.2,81.74 36.83,82.37 36.83,82.5 33.91,85.42 33.78,85.29 36.7,82.37 36.2,81.86 35.81,82.24 36.2,82.62 34.29,84.53 34.29,84.66 38.1,88.47 38.1,88.59 31.62,95.07 31.62,95.2 37.47,101.04 37.47,101.17 32.89,105.74 31.75,104.6 37.47,98.88 37.47,98.75 31.62,92.91 31.62,92.78 38.1,86.31 38.1,86.18 35.43,83.51 34.42,84.53 38.1,88.21 38.1,88.34 31.62,94.82 31.62,94.94 37.47,100.79 37.47,100.91 32.89,105.48 32,104.6 37.47,99.13 37.47,99.01 31.62,93.17 31.62,93.04 38.1,86.56 38.1,86.43 35.43,83.77 34.67,84.53 38.1,87.96 38.1,88.09 31.62,94.56 31.62,94.69 37.47,100.53 37.47,100.66 32.89,105.23 32.26,104.6 37.47,99.39 37.47,99.26 31.62,93.42 31.62,93.29 38.1,86.82 38.1,86.69 35.43,84.02 34.92,84.53 38.1,87.7 38.1,87.83 31.62,94.31 31.62,94.44 37.47,100.28 37.47,100.4 32.89,104.98 32.51,104.6 37.47,99.64 37.47,99.52 31.62,93.67 31.62,93.55 38.1,87.07 38.1,86.94 35.43,84.28 35.18,84.53 35.18,84.66 33.53,86.31 33.53,87.45 38.23,92.15 38.23,92.28 31.5,99.01 31.5,99.13 37.08,104.72 37.08,104.85 35.18,106.75 34.8,106.37 37.21,103.96 37.21,103.83 31.5,98.12 31.5,97.99 38.23,91.26 38.23,91.13 33.66,86.56 33.66,86.43 37.21,82.88 37.08,82.75 35.31,84.53 35.31,84.66 38.1,87.45 38.1,87.58 31.62,94.05 31.62,94.18 37.47,100.02 37.47,100.15 32.89,104.72 32.77,104.6 37.47,99.9 37.47,99.77 31.62,93.93 31.62,93.8 38.1,87.32 38.1,87.2 35.69,84.78 35.56,84.78 33.66,86.69 33.66,87.32 38.23,91.9 38.23,92.02 31.5,98.75 31.5,98.88 37.08,104.47 37.08,104.6 35.18,106.5 35.05,106.37 37.21,104.21 37.21,104.09 31.5,98.37 31.5,98.25 38.23,91.52 38.23,91.39 33.78,86.94 33.78,86.82 37.47,83.13 37.59,83.26 33.78,87.07 33.78,87.2 38.23,91.64 38.23,91.77 31.5,98.5 31.5,98.63 36.07,103.2 36.07,103.33 32.13,107.26 32,107.26 32,107.01 32.89,106.12 33.02,106.12 37.47,101.67 37.47,101.55 31.62,95.71 31.62,95.58 38.1,89.1 38.1,88.97 34.04,84.91 33.91,85.04 38.1,89.23 38.1,89.36 v32.77,94.69
  Top 0.127: v39.37,97.36 39.37,109.42 46.1,109.42 46.1,109.17 39.5,109.17 39.5,85.42 39.62,85.42 49.15,94.94 49.15,100.02 48.26,100.02 48.13,99.9 47.88,99.9 47.88,100.02 47.75,100.15 47.37,100.15 47.37,100.53 47.12,100.79 47.24,100.91 39.62,108.53 39.62,109.04 44.83,109.04 44.96,108.91 43.43,107.39 41.91,108.91 39.75,108.91 39.75,108.53 39.62,108.41 39.62,85.67 39.75,85.67 49.02,94.94 49.15,94.82 49.15,81.86 48.9,81.86 48.39,81.35 48.39,81.1 48.26,80.97 48.26,80.47 48.39,80.34 48.39,80.08 48.9,79.58 49.15,79.58 49.28,79.45 42.04,72.21 42.04,66.62 41.4,66.62 41.27,66.5 41.27,65.73 41.4,65.61 41.78,65.61 41.78,65.35 41.4,65.35 40.01,63.96 39.75,64.21 38.23,64.21 37.97,64.46 37.85,64.46 37.85,64.21 36.07,64.21 36.07,66.62 36.2,66.75 40.01,66.75 40.13,66.62 40.13,64.21 40.01,64.08 39.88,64.21 39.88,64.46 40.01,64.46 40.01,66.62 36.2,66.62 36.2,64.34 36.32,64.34 36.32,66.37 36.45,66.5 38.1,66.5 38.1,64.46 37.97,64.34 37.97,63.96 36.07,63.96 36.07,61.8 35.43,61.8 35.43,63.58 35.31,63.7 35.31,66.75 35.05,67 33.4,67 25.91,59.51 16.13,59.51 16.13,59.64 16.51,60.02 16.51,61.92 16.26,62.18 16.13,62.18 16.13,61.92 16.38,61.67 16.38,60.02 16.51,59.89 16.51,59.64 16.38,59.64 16.38,59.77 16.26,59.89 16.26,61.67 16.38,61.8 16.38,61.92 16.26,62.05 16.51,62.3 16.51,63.19 16.26,63.45 12.57,63.45 12.45,63.32 12.45,59.51 12.57,59.38 13.97,59.38 14.1,59.51 14.1,59.64 13.59,59.64 13.46,59.51 12.57,59.51 12.57,59.77 12.7,59.77 12.83,59.64 13.21,59.64 13.21,60.02 13.34,60.15 13.34,60.4 13.08,60.4 12.7,60.02 12.57,60.02 12.57,61.04 12.7,61.04 12.7,60.27 12.83,60.27 12.83,61.04 12.57,61.29 12.57,63.32 13.34,63.32 13.34,63.19 12.83,62.69 12.7,62.69 12.7,63.19 13.08,63.19 13.08,63.07 12.95,62.94 13.08,62.81 13.21,62.81 13.34,62.69 13.34,62.43 12.83,62.43 12.7,62.3 12.7,61.42 12.95,61.42 13.08,61.29 13.34,61.29 13.34,61.67 13.08,61.67 12.95,61.54 12.83,61.54 12.83,61.67 12.95,61.67 13.46,62.18 13.46,62.69 13.21,62.94 13.59,63.32 14.61,63.32 14.61,63.19 14.35,62.94 14.35,62.81 14.48,62.81 14.48,62.94 14.35,63.07 14.35,63.19 14.48,63.19 14.61,63.07 14.86,63.32 15.24,63.32 15.24,63.19 15.11,63.07 14.99,63.19 14.86,63.19 14.86,63.07 14.99,62.94 15.88,62.94 15.88,62.69 16.38,62.69 16.38,63.19 16.26,63.32 22.23,69.29 41.91,69.29 41.91,72.21 49.02,79.32 49.02,79.45 44.96,79.45 44.83,79.58 44.32,79.58 44.07,79.83 43.81,79.58 43.56,79.58 43.43,79.45 42.93,79.45 42.8,79.58 42.55,79.58 42.04,80.08 42.04,80.34 41.91,80.47 41.91,80.97 42.04,81.1 42.04,81.35 42.55,81.86 42.8,81.86 42.93,81.99 43.43,81.99 43.56,81.86 43.81,81.86 44.45,81.23 44.83,81.23 45.09,80.97 45.47,81.35 45.47,83.26 45.34,83.39 45.09,83.39 44.58,83.89 44.58,84.15 44.45,84.28 44.45,84.78 44.58,84.91 44.58,85.16 45.09,85.67 45.34,85.67 45.47,85.8 45.97,85.8 46.1,85.67 46.35,85.67 46.86,85.16 46.86,84.91 46.99,84.78 46.99,84.28 46.86,84.15 46.86,83.89 46.35,83.39 46.1,83.39 45.97,83.26 45.97,80.97 45.09,80.08 45.09,79.83 44.96,79.7 44.96,79.58 34.8,69.42 25.53,69.42 25.4,69.54 39.5,83.64 41.91,81.23 41.91,81.1 30.35,69.54 25.78,69.54 25.78,69.67 39.5,83.39 39.62,83.39 39.75,83.51 41.91,81.35 30.23,69.67 26.04,69.67 26.04,69.8 39.5,83.26 39.75,83.26 41.66,81.35 41.66,81.23 30.23,69.8 26.29,69.8 26.29,69.92 39.5,83.13 39.75,83.13 41.53,81.35 41.53,81.23 30.23,69.92 26.54,69.92 26.54,70.05 39.5,83.01 39.75,83.01 41.4,81.35 41.4,81.23 30.23,70.05 26.8,70.05 26.8,70.18 39.5,82.88 39.75,82.88 41.27,81.35 41.27,81.23 30.23,70.18 27.05,70.18 27.05,70.31 39.5,82.75 39.75,82.75 41.15,81.35 41.15,81.23 30.23,70.31 27.3,70.31 27.3,70.43 39.5,82.62 39.75,82.62 41.02,81.35 41.02,81.23 30.23,70.43 27.56,70.43 27.56,70.56 39.5,82.5 39.75,82.5 40.89,81.35 40.89,81.23 30.23,70.56 27.81,70.56 27.81,70.69 39.5,82.37 39.75,82.37 40.77,81.35 40.77,81.23 30.23,70.69 28.07,70.69 28.07,70.81 39.5,82.24 39.75,82.24 40.64,81.35 40.64,81.23 30.23,70.81 28.32,70.81 28.32,70.94 39.5,82.12 39.75,82.12 40.51,81.35 40.51,81.23 30.23,70.94 28.57,70.94 28.57,71.07 39.5,81.99 39.75,81.99 40.39,81.35 40.39,81.23 30.23,71.07 28.83,71.07 28.83,71.19 39.5,81.86 39.75,81.86 40.26,81.35 40.26,81.23 30.23,71.19 29.08,71.19 29.08,71.32 39.5,81.74 39.75,81.74 40.13,81.35 40.13,81.23 30.23,71.32 29.34,71.32 29.34,71.45 39.5,81.61 39.75,81.61 40.01,81.35 40.01,81.23 30.23,71.45 29.59,71.45 29.59,71.58 39.5,81.48 39.75,81.48 39.88,81.35 39.88,81.23 30.23,71.58 29.84,71.58 29.84,71.7 39.5,81.35 39.75,81.35 39.75,81.23 30.23,71.7 30.1,71.7 30.1,71.83 39.5,81.23 v39.62,81.23
  Top 0.127: v40.77,80.08 30.35,69.67 30.48,69.54 34.8,69.54 44.7,79.45 46.86,77.29 38.99,69.42 35.05,69.42 35.05,69.54 44.7,79.2 44.83,79.2 44.96,79.32 48.77,79.32 48.77,79.2 46.99,77.42 46.86,77.42 45.09,79.2 35.43,69.54 35.31,69.54 35.31,69.67 44.7,79.07 44.83,79.07 46.61,77.29 46.61,77.16 38.99,69.54 35.56,69.54 35.43,69.67 44.7,78.94 46.48,77.16 38.99,69.67 35.81,69.67 35.81,69.8 44.7,78.69 44.83,78.69 45.09,78.94 46.61,77.42 38.99,69.8 36.07,69.8 36.07,69.92 44.7,78.56 44.96,78.56 45.09,78.69 46.35,77.42 38.86,69.92 36.32,69.92 36.32,70.05 44.7,78.43 45.09,78.43 46.1,77.42 46.1,77.29 38.86,70.05 36.58,70.05 36.58,70.18 44.7,78.31 45.09,78.31 45.97,77.42 45.97,77.29 38.86,70.18 36.83,70.18 36.83,70.31 44.7,78.18 45.09,78.18 45.85,77.42 45.85,77.29 38.86,70.31 37.08,70.31 37.08,70.43 44.7,78.05 45.09,78.05 45.72,77.42 45.72,77.29 38.86,70.43 37.34,70.43 37.34,70.56 44.7,77.93 45.09,77.93 45.59,77.42 45.59,77.29 38.86,70.56 37.59,70.56 37.59,70.69 44.7,77.8 45.09,77.8 45.47,77.42 45.47,77.29 38.86,70.69 37.85,70.69 37.85,70.81 44.7,77.67 45.09,77.67 45.34,77.42 45.34,77.29 38.86,70.81 38.1,70.81 38.1,70.94 44.7,77.54 45.09,77.54 45.21,77.42 45.21,77.29 38.86,70.94 38.35,70.94 38.35,71.07 44.7,77.42 45.09,77.42 45.09,77.29 38.86,71.07 38.61,71.07 38.61,71.19 44.7,77.29 44.83,77.29 44.83,77.16 38.86,71.19 v38.73,71.19 | v37.47,72.46 33.4,72.46 30.73,69.8 30.73,69.67 34.8,69.67 37.34,72.21 37.34,72.34 33.4,72.34 30.99,69.92 30.99,69.8 34.8,69.8 37.08,72.08 37.08,72.21 33.4,72.21 31.24,70.05 31.24,69.92 34.8,69.92 36.83,71.96 36.83,72.08 33.4,72.08 31.5,70.18 31.5,70.05 34.8,70.05 36.58,71.83 36.58,71.96 33.4,71.96 31.75,70.31 31.75,70.18 34.8,70.18 36.32,71.7 36.32,71.83 33.4,71.83 32,70.43 32,70.31 34.8,70.31 36.07,71.58 36.07,71.7 33.4,71.7 32.26,70.56 32.26,70.43 34.8,70.43 35.81,71.45 35.81,71.58 v33.4,71.58
  Top 0.127: v27.18,72.34 27.3,72.34 36.07,81.1 31.24,85.93 31.11,85.93 26.16,80.97 26.16,71.45 26.42,71.45 27.18,72.21 26.29,73.1 26.29,80.97 31.11,85.8 31.24,85.8 35.94,81.1 27.3,72.46 27.05,72.46 26.42,73.1 26.42,80.97 31.11,85.67 31.24,85.67 35.81,81.1 27.3,72.59 27.05,72.59 26.54,73.1 26.54,80.97 31.11,85.55 31.24,85.55 35.69,81.1 27.3,72.72 27.05,72.72 26.67,73.1 26.67,80.97 31.11,85.42 31.24,85.42 35.56,81.1 27.3,72.85 27.05,72.85 26.8,73.1 26.8,80.97 31.11,85.29 31.24,85.29 35.43,81.1 27.3,72.97 27.05,72.97 26.92,73.1 26.92,80.97 31.11,85.16 31.24,85.16 35.31,81.1 27.3,73.1 27.05,73.1 27.05,80.97 31.11,85.04 31.24,85.04 35.18,81.1 27.3,73.23 27.18,73.23 27.18,80.97 31.11,84.91 31.24,84.91 35.05,81.1 27.43,73.48 27.3,73.48 27.3,80.97 31.11,84.78 31.24,84.78 34.92,81.1 27.56,73.73 27.43,73.73 27.43,80.97 31.11,84.66 31.24,84.66 34.8,81.1 27.69,73.99 27.56,73.99 27.56,80.97 31.11,84.53 31.24,84.53 34.67,81.1 27.81,74.24 27.69,74.24 27.69,80.97 31.11,84.4 31.24,84.4 34.54,81.1 27.94,74.5 27.81,74.5 27.81,80.97 31.11,84.28 31.24,84.28 34.42,81.1 28.07,74.75 27.94,74.75 27.94,80.97 31.11,84.15 31.24,84.15 34.29,81.1 28.19,75 28.07,75 28.07,80.97 31.11,84.02 31.24,84.02 34.16,81.1 28.32,75.26 28.19,75.26 28.19,80.97 31.11,83.89 31.24,83.89 34.04,81.1 28.45,75.51 28.32,75.51 28.32,80.97 31.11,83.77 31.24,83.77 33.91,81.1 28.57,75.77 28.45,75.77 28.45,80.97 31.11,83.64 31.24,83.64 33.78,81.1 28.7,76.02 28.57,76.02 28.57,80.97 31.11,83.51 31.24,83.51 33.66,81.1 28.83,76.27 28.7,76.27 28.7,80.97 v31.11,83.39
  Top 0.127: v24.77,78.31 23.88,78.31 18.16,84.02 J4.G1 | v83.06,18.62 83.19,18.74 83.31,18.62 83.19,18.49 83.06,18.49 82.68,18.87 82.55,18.87 82.55,18.74 82.68,18.62 82.8,18.62 83.19,19 83.57,18.62 83.44,18.49 83.31,18.49 82.8,19 82.42,19 82.04,18.62 81.92,18.62 81.66,18.87 80.52,18.87 80.52,18.74 81.03,18.24 81.15,18.24 81.92,19 82.04,19 82.55,18.49 82.55,18.36 83.57,18.36 83.57,18.49 82.93,19.12 81.79,19.12 81.66,19 80.26,19 80.14,18.87 81.53,17.47 81.41,17.35 81.28,17.35 79.88,18.74 79.88,18.87 80.14,19.12 81.66,19.12 82.3,18.49 82.42,18.49 83.19,19.25 85.34,17.09 87.12,17.09 87.12,19.38 83.06,19.38 82.93,19.25 80.01,19.25 79.88,19.12 79.88,19 79.63,18.74 81.15,17.22 81.15,16.97 79.5,16.97 79.5,18.87 79.63,18.87 81.41,17.09 82.04,17.09 82.17,17.22 82.3,17.09 82.17,16.97 81.28,16.97 81.28,17.09 81.79,17.6 81.66,17.73 81.53,17.6 79.76,19.38 79.38,19 79.25,19 78.87,19.38 78.87,19.51 79.88,19.51 80.01,19.38 82.93,19.38 85.34,16.97 87.25,16.97 87.25,19.51 80.01,19.51 79.25,18.74 78.36,19.63 78.49,19.76 78.61,19.63 79.12,19.63 79.25,19.76 87.25,19.76 87.38,19.89 87.5,19.89 87.5,19.63 79.25,19.63 78.99,19.89 78.36,19.89 78.36,19.76 79.38,18.74 79.38,16.84 82.3,16.84 82.3,16.97 82.04,17.22 82.04,17.47 81.79,17.47 81.53,17.73 81.53,18.24 81.79,18.49 82.17,18.49 82.42,18.24 83.95,18.24 85.34,16.84 87.38,16.84 87.38,19.38 87.63,19.63 87.63,20.14 87.88,20.39 87.88,20.52 87.38,20.52 87.38,20.39 87.63,20.39 EPD_C1.1 | v85.98,15.32 85.72,15.32 84.33,13.92 84.33,13.54 84.07,13.28 83.57,13.28 83.31,13.54 83.19,13.54 83.06,13.41 82.68,13.41 82.42,13.66 82.42,14.17 80.52,14.17 78.87,12.52 69.09,12.52 67.69,13.92 67.31,13.92 67.06,14.17 67.06,15.44 66.93,15.57 66.93,17.09 66.67,17.35 66.67,17.73 66.93,17.98 67.44,17.98 67.69,17.73 67.69,17.22 67.44,16.97 67.44,15.82 67.82,15.44 70.1,15.44 70.23,15.32 70.23,14.05 69.98,13.79 68.71,13.79 68.45,14.05 68.58,14.17 68.71,14.17 68.96,13.92 69.98,13.92 70.1,14.05 70.1,15.32 76.45,21.66 76.45,22.3 77.22,23.06 77.22,23.19 73.03,23.19 69.98,20.14 69.98,19.76 69.72,19.51 69.22,19.51 68.96,19.76 66.55,19.76 66.42,19.63 66.42,18.62 66.67,18.36 69.22,18.36 69.47,18.62 69.47,19.38 69.34,19.38 68.83,18.87 68.58,18.87 68.58,18.49 66.67,18.49 66.55,18.62 66.55,19.63 68.58,19.63 68.58,19.25 68.83,19 68.96,19.12 69.34,18.74 69.34,18.62 69.22,18.49 71.12,16.59 71.25,16.59 76.33,21.66 76.45,21.54 76.45,15.06 77.6,13.92 77.6,13.03 77.34,13.03 77.34,13.16 77.47,13.28 77.47,13.79 76.45,13.79 76.45,14.17 76.71,14.43 76.96,14.43 77.09,14.55 76.58,15.06 74.55,13.03 69.47,13.03 68.96,13.54 68.96,13.66 75.06,13.66 76.33,14.93 76.33,21.28 76.2,21.28 70.36,15.44 70.36,13.79 75.06,13.79 76.2,14.93 76.2,21.03 76.07,21.03 70.48,15.44 70.48,13.92 75.06,13.92 76.07,14.93 76.07,20.78 75.95,20.78 70.61,15.44 70.61,14.05 75.06,14.05 75.95,14.93 75.95,20.52 75.82,20.52 70.74,15.44 70.74,14.17 75.06,14.17 75.82,14.93 75.82,20.27 75.69,20.27 70.87,15.44 70.87,14.3 75.06,14.3 75.69,14.93 75.69,20.01 75.56,20.01 70.99,15.44 70.99,14.43 75.06,14.43 75.56,14.93 75.56,19.76 75.44,19.76 71.12,15.44 71.12,14.55 75.06,14.55 75.44,14.93 75.44,19.51 75.31,19.51 71.25,15.44 71.25,14.68 75.06,14.68 75.31,14.93 75.31,19.25 75.18,19.25 71.37,15.44 71.37,14.81 75.06,14.81 75.18,14.93 75.18,19 75.06,19 71.5,15.44 71.5,14.93 75.06,14.93 75.06,18.74 74.93,18.74 71.63,15.44 71.63,15.06 74.93,15.06 74.93,18.49 74.8,18.49 71.75,15.44 71.75,15.19 74.8,15.19 74.8,18.24 74.68,18.24 71.88,15.44 71.88,15.32 74.68,15.32 74.68,17.98 74.55,17.98 72.14,15.57 72.14,15.44 74.55,15.44 74.55,17.73 74.42,17.73 72.39,15.7 72.39,15.57 74.42,15.57 74.42,17.47 74.3,17.47 72.64,15.82 72.64,15.7 74.3,15.7 74.3,17.22 74.17,17.22 72.9,15.95 72.9,15.82 74.17,15.82 74.17,16.97 74.04,16.97 73.15,16.08 73.15,15.95 74.04,15.95 74.04,16.71 73.91,16.71 73.41,16.2 73.41,16.08 73.91,16.08 73.91,16.46 73.79,16.46 v73.53,16.2